# Altium PCB MEZON_NEGATIVE.PcbDoc
Units mm, origin at the board's own origin, x right, y up, seen from the top; angles counter-clockwise.
Board outline 45.72 x 17.14 mm, 2 copper layers (Top Layer, Bottom Layer); 16 components, 7 nets, 50 pads, 0 vias.
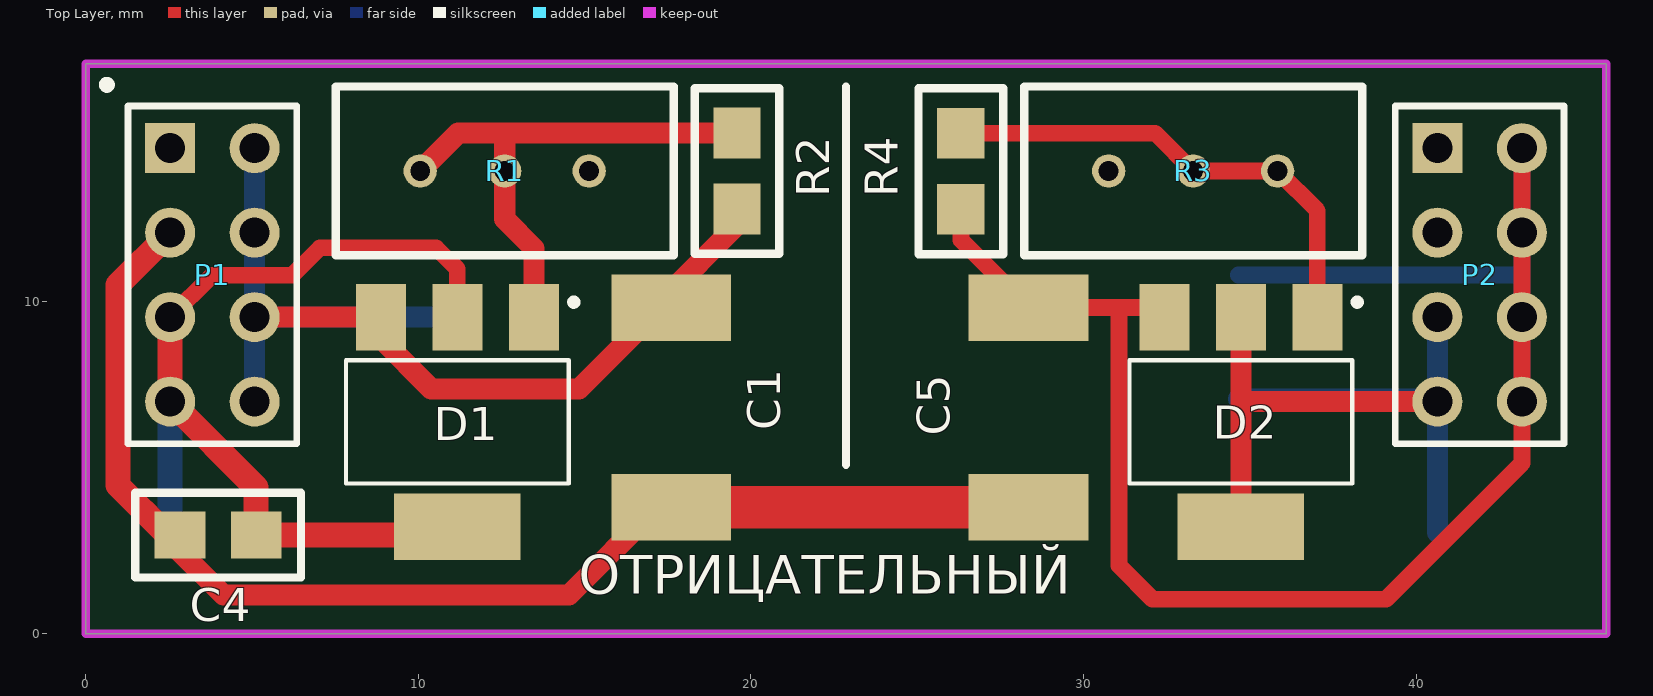
[diagram p0: Top Layer view]
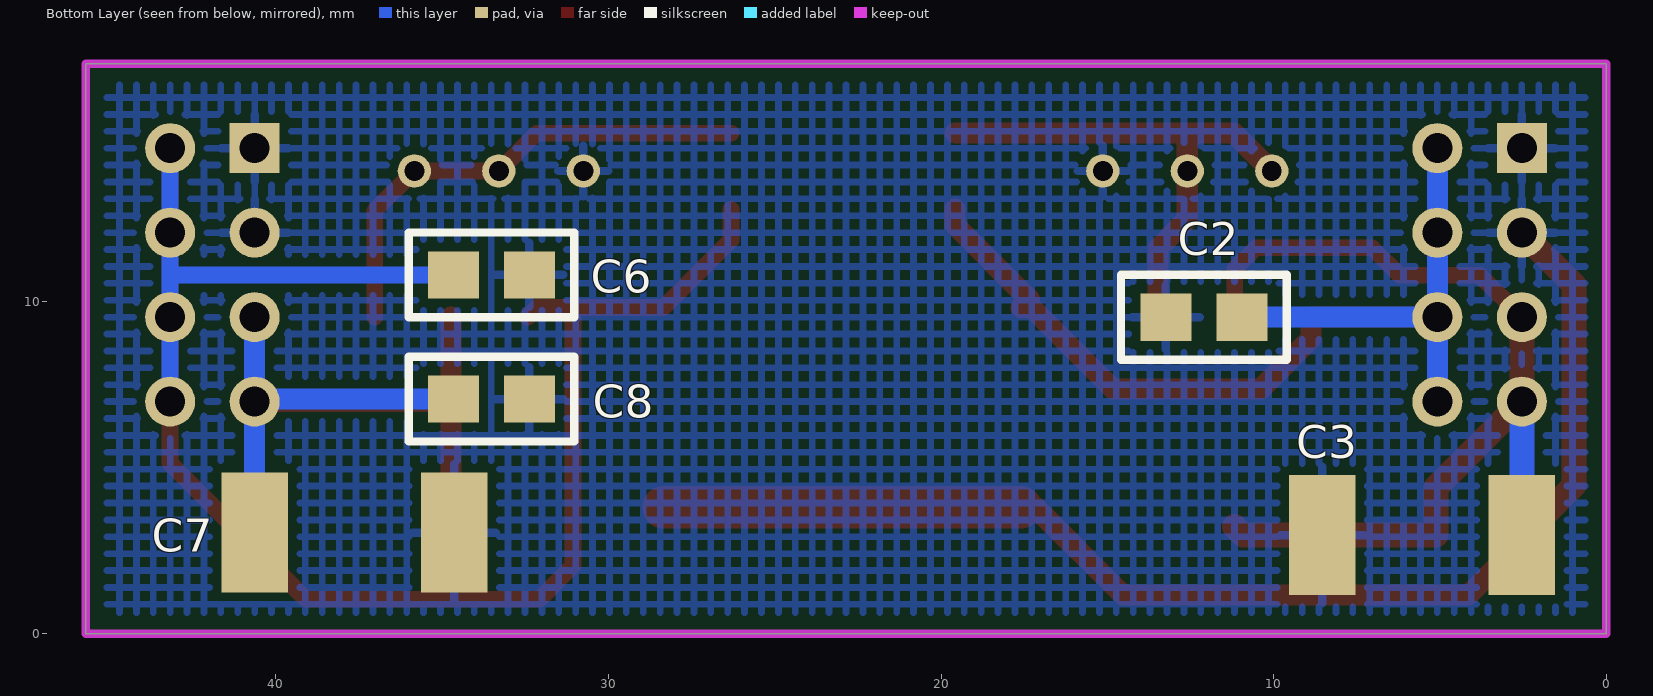
[diagram p1: Bottom Layer view, seen from below]

## Layer stack, top to bottom
Top Solder: solder mask 0.0102, Solder Resist, Dk 3.5
Top Layer: signal copper 0.0356
Dielectric 1: dielectric 0.32, FR-4, Dk 4.8
Bottom Layer: signal copper 0.0356
Bottom Solder: solder mask 0.0102, Solder Resist, Dk 3.5

## Board outline
0,0 45.72,0 45.72,17.145 0,17.145

## Design rules (kind name [scope] priority, off if disabled: settings)
Clearance [All] p1: gap=0.254
PolygonConnect [All] p1: connectstyle=Relief reliefconductorwidth=0.254 reliefentries=4 polygonreliefangle="90 Angle" airgapwidth=0.254
RoutingVias [All] p1: holewidth=0.711 width=1.27 viastyle="Through Hole" minholewidth=0.711 minwidth=1.27 maxholewidth=0.711 maxwidth=1.27
SolderMaskExpansion [All] p1: expansion=0.102
Width [All] p1: maxlimit=2.254 minlimit=0.254 preferedwidth=0.254
29 further rules are at their usual default settings.

## Components (designator, comment, footprint, x,y, rotation, side; value= is the part's Value field where it differs from the comment)
C1 "10,0" Cap_BIG 15.697,2.718 r0 top
C2 "1,0" CAP_SMALL 14.605,8.255 r180 bottom
C3 "10,0" Cap_BIG 1.448,1.067 r90 bottom
C4 "1,0" CAP_SMALL 1.473,1.702 r0 top
C5 "10,0" Cap_BIG 26.441,2.718 r0 top
C6 "1,0" CAP_SMALL 31.013,12.065 r0 bottom
C7 "10,0" Cap_BIG 41.732,4.953 r270 bottom
C8 "1,0" CAP_SMALL 31.013,8.331 r0 bottom
D1 "LM337" SOT230P700X180-4N 11.176,6.375 r180 top
D2 "LM337" SOT230P700X180-4N 34.731,6.375 r180 top
P1 "Header 4X2" HDR2X4 2.54,14.605 r270 top
P2 "Header 4X2" HDR2X4 40.64,14.605 r270 top
R1 "3296" PODSTR_RES_3296 10.058,13.919 r0 top
R2 "120" RES 18.339,11.437 r0 top
R3 "3296" PODSTR_RES_3296 35.839,13.919 r180 top
R4 "120" RES 25.07,11.43 r0 top

## Footprints (in the part's own frame and the unit in brackets; to place one, negate y for a bottom-side part, rotate by r counter-clockwise, add the part's x,y. Pads: shape width x height; smd on the part's side, far side on the other; paste and mask are expansions set on the pad)
Cap_BIG [mm] "FROM_MAX"
  rect 3.6x2 smd: 1(1.905,7.092) 2(1.905,1.092)
  body extent 0,-0.01 3.81,8.19, height 2.54
CAP_SMALL [mil] "FROM_MAX"
  rect 60x55.98 smd: 1(53.71,50) 2(143.71,50)
  silkscreen extent 1,0 197,100, body extent 20,18 178,82, height 100
HDR2X4 [mm] "Connector; Header; 4x2 Position"
  rect 1.5x1.5 hole 0.9: 1(0,0)
  round 1.5 hole 0.9: 2(0,2.54) 3(2.54,0) 4(2.54,2.54) 5(5.08,0) 6(5.08,2.54) 7(7.62,0) 8(7.62,2.54)
  silkscreen extent -1.27,-1.27 8.89,3.81
PODSTR_RES_3296 [mm]
  round 1 hole 0.6: 1(0,0) 2(2.54,0) 3(5.08,0)
  silkscreen extent -2.54,-2.54 7.62,2.54
RES [mil] "FROM_MAX"
  rect 55.98x60 smd: 1(49,52.71) 2(49,142.71)
  silkscreen extent -1,0 99,196, body extent 17,19 81,177, height 100
SOT230P700X180-4N [mm]
  rect 1.5x2 smd: 1(-2.3,-3.15) 2(0,-3.15) 3(2.3,-3.15)
  rect 3.8x2 smd: 4(0,3.15)
  silkscreen extent -3.6,-3.7 3.35,1.85

## Part data
C1 C3 C5 C7: library part CAP_BIG
C2 C4 C6 C8: library part CAP_SMALL
P1 P2: "Header, 4-Pin, Dual row"
R1 R3: library part PODSTR_RES_NEW
R2 R4: library part RES

## Nets (pads, with @x,y where several pads share a name; then routed paths per layer and width w, separated by ;. In a path a pad name is that pad's centre, name@x,y a point inside that pad or via, vN(x,y) a via of type N, cw(c..) or ccw(c..) an arc to the next point about the centre after c; other vN are vias at no path point)
GND: C1.2 C2.1 C3.1 C4.1 C5.2 C6.1 C7.1 C8.1 P1.1 P1.3 P2.1 P2.3 R1.3 R3.3 | length 38.4
  Top Layer w0.635: C4.1 2.837,2.471 4.14,1.168 14.529,1.168 17.17,3.81 C1.2
  Top Layer w0.75: P1.3 0.965,10.49 0.965,4.47 2.464,2.972 C4.1
  Top Layer w1.27: C1.2 C5.2
IN1: C3.2 C4.2 D1.2 D1.4 P1.5 P1.7 | length 29
  Top Layer w0.5: P1.5 3.794,10.779 6.207,10.779 7.036,11.608 10.541,11.608 11.176,10.973 D1.2
  Top Layer w0.75: P1.5 P1.7 5.123,4.402 C4.2 10.922,2.972 D1.4
  Bottom Layer w0.75: C3.2 P1.7
IN2: C7.2 C8.2 D2.2 D2.4 P2.5 P2.7 | length 24.7
  Top Layer w0.635: D2.4 34.731,6.96 ; D2.2 34.731,6.96 ; P2.7 34.757,6.985 34.731,6.96
  Bottom Layer w0.635: C8.2 40.564,7.061 P2.7 ; C7.2 P2.7 ; P2.5 P2.7
NetD1_1: D1.1 R1.1 R1.2 R2.2 | length 15.9
  Top Layer w0.635: R1.1 11.201,15.062 12.649,15.062 ; D1.1 13.476,11.594 12.598,12.471 R1.2 12.598,15.011 12.649,15.062 ; R2.2 12.649,15.062
NetD2_1: D2.1 R3.1 R3.2 R4.2 | length 14.9
  Top Layer w0.5: R4.2 32.164,15.055 R3.2 R3.1 37.031,12.727 D2.1
OUT1: C1.1 C2.2 D1.3 P1.2 P1.4 P1.6 P1.8 R2.1 | length 31.9
  Top Layer w0.635: P1.6 D1.3 8.876,8.879 10.389,7.366 14.834,7.366 17.278,9.81 C1.1 ; C1.1@17.351,10.061 19.583,12.294 R2.1
  Bottom Layer w0.635: P1.8 P1.6 ; P1.2 P1.4 P1.6 ; C2.2 P1.6
OUT2: C5.1 C6.2 D2.3 P2.2 P2.4 P2.6 P2.8 R4.1 | length 55.6
  Top Layer w0.508: R4.1 26.314,11.842 C5.1 31.064,9.81 ; D2.3 32.147,9.81 31.064,9.81 ; P2.2 P2.4 P2.6 P2.8 43.18,5.131 39.091,1.041 32.08,1.041 31.064,2.057 31.064,9.81
  Bottom Layer w0.508: C6.2 43.18,10.795 ; P2.8 P2.6 43.18,10.795 ; P2.2 P2.4 43.18,10.795

## Polygon pours and split planes (outlines as drawn)
GND on Bottom Layer "Top Layer-No Net" (hatched 90Degree grid 0.508 track 0.203, remove dead copper, pour order 5): 0.635,16.51 0.635,0.635 45.085,0.635 45.085,16.51

## Keep-outs
Keep-Out Layer:
  the board outline again, w0.254

## Silkscreen, mask and mechanical layers (free items; w line width, h text height)
Top Overlay:
  circle w0.254: c0.635,16.51 r0.114
  lines w0.254: 22.86,5.08 22.86,16.459
  text "ОТРИЦАТЕЛЬНЫЙ" at 14.828,0.813 h2